# EAGLE board LRT_arduino_v2a (EAGLE 7.6.0)
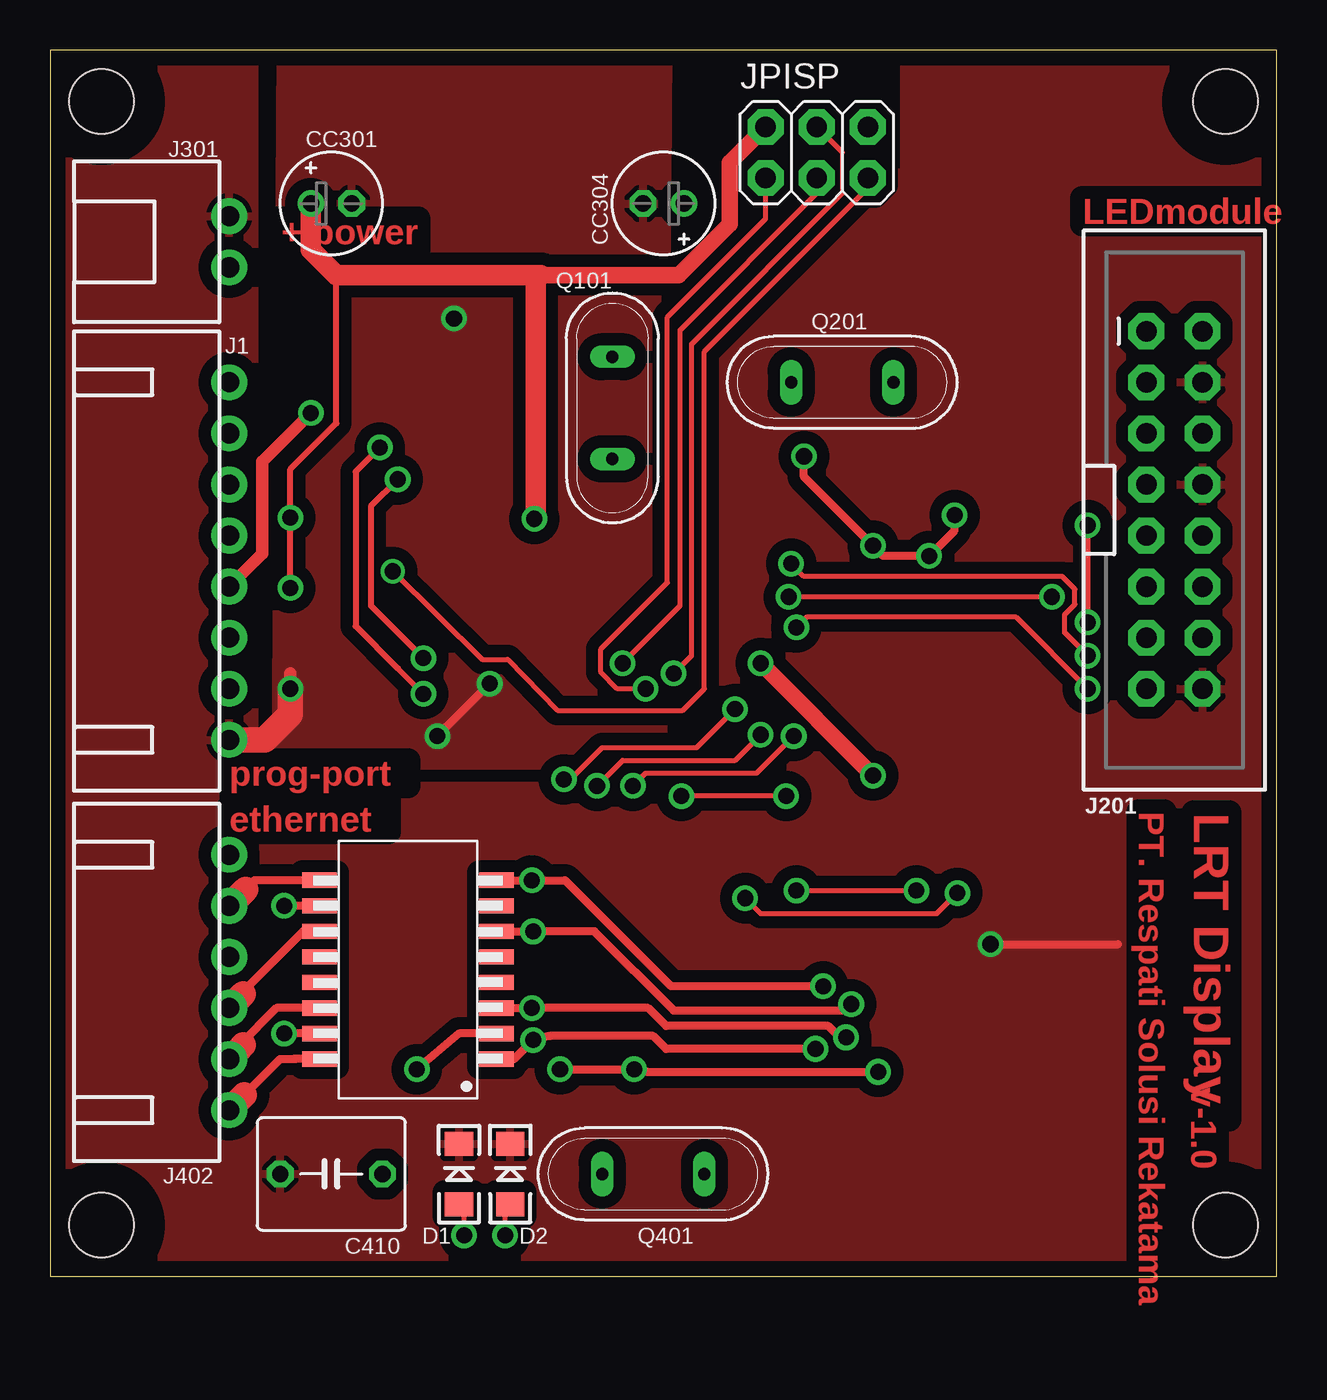
[diagram p0: board, top side]
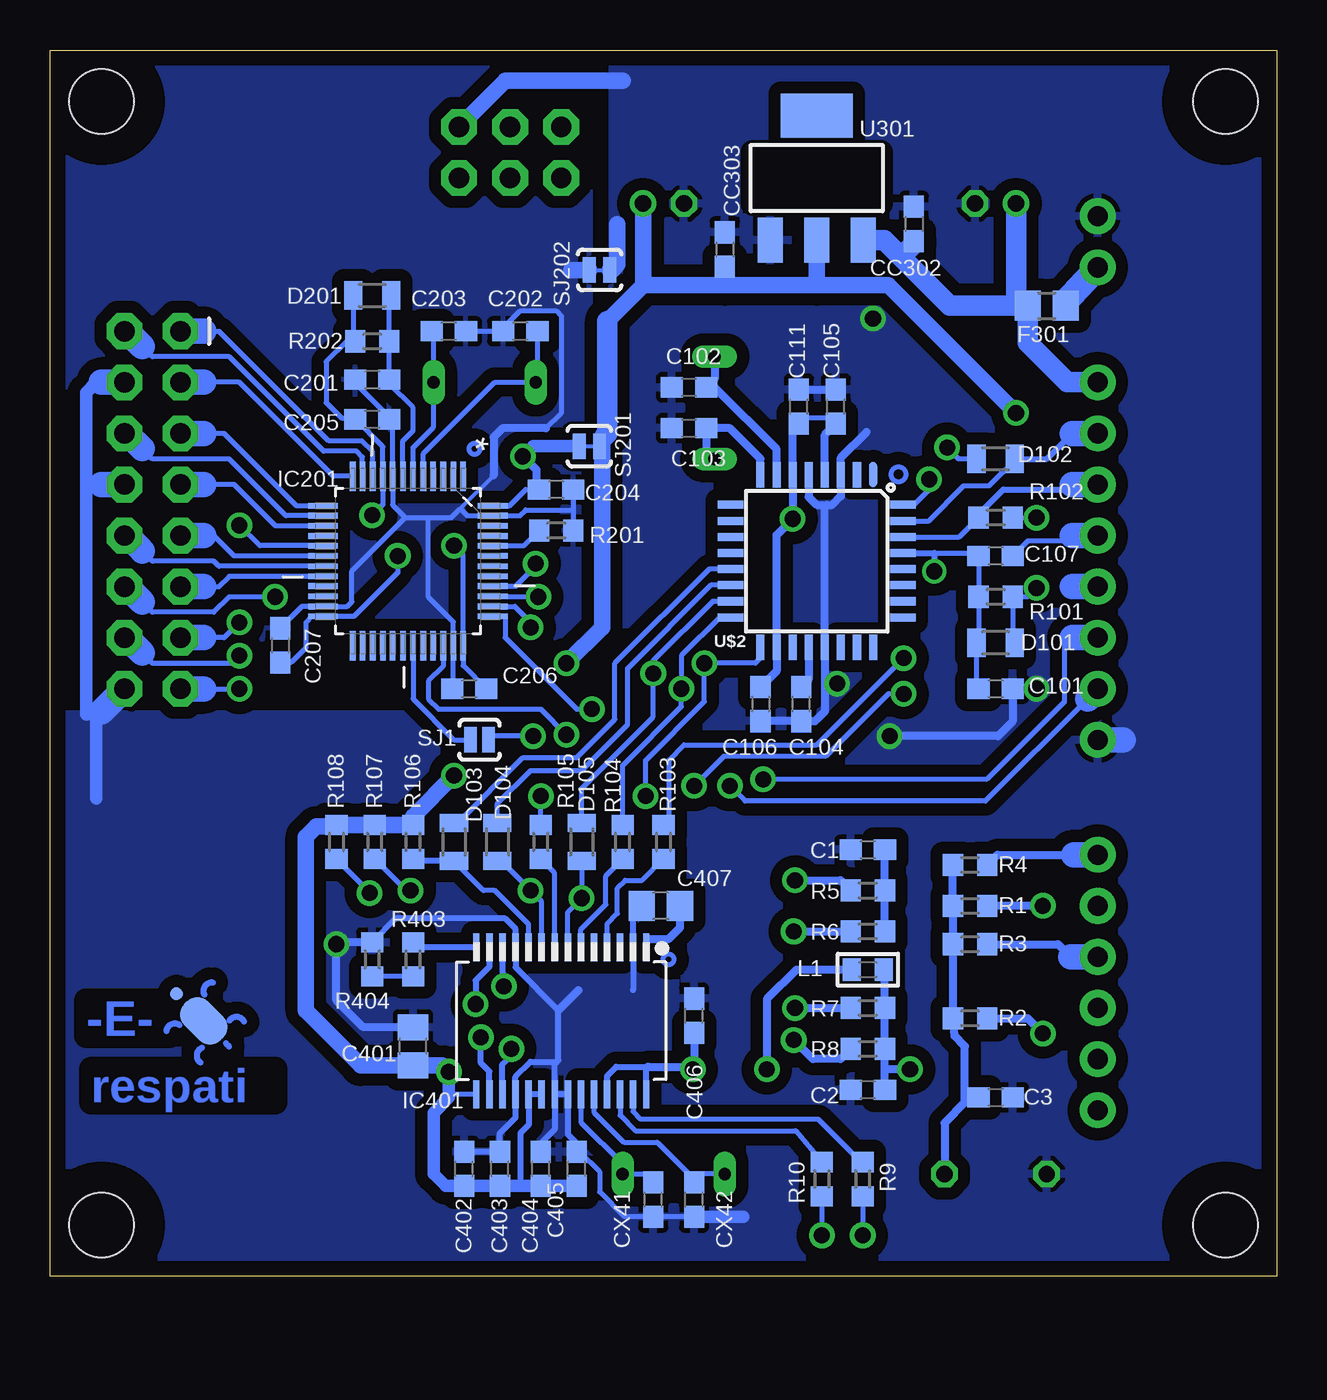
[diagram p1: board, bottom side, seen from below]

Size 60.96 x 60.96 mm. Coordinates in mm from the lower left corner, seen from the top.
Outline: 0,0 60.96,0 60.96,60.96 0,60.96 0,0
Copper layers (1*16): Top 0.035mm / dielectric 1.5mm / Bottom 0.035mm
Design rules "default *": minimum track width 10mil, minimum drill 24mil, track to track 8mil, track to pad 8mil, pad to pad 8mil, via to via 8mil, smd to smd 8mil, copper to edge 30mil, drill to drill 8mil, minimum pad ring 10mil, minimum via ring 8mil, stop-mask expansion 4mil, vias tented up to drill 0mil, thermal gap 10mil
Net classes: 0 default: width 0.406 mm, drill 0.59 mm, clearance 0.305 mm; 1 ic: width 0.254 mm, drill 0.59 mm, clearance 0.203 mm
Holes 3.2 mm at 2.54,2.54 58.42,2.54 2.54,58.42 58.42,58.42
tRestrict: area 0,55.9 to 5.1,61; area 55.9,55.9 to 61,61; area 55.9,0 to 61,5.1; area 0,0 to 5.1,5.1
bRestrict: area 0,0 to 5.1,5.1; area 55.9,0 to 61,5.1; area 55.9,55.9 to 61,61; area 0,55.9 to 5.1,61; area 19.7,53.3 to 26,55.9

## Footprints (pad centres in the part's own frame; a part is rotated, then mirrored left to right if it is on the bottom)
C0603 = smd 1.1 x 1: 1 -0.85,0; 2 0.85,0
C0805 = smd 1.3 x 1.5: 1 -0.95,0; 2 0.95,0
C050-055X075 = drill 0.813 octagon: 1 -2.54,0; 2 2.54,0
E2-5 = drill 0.813 pad 1.27: + -1.016,0 | drill 0.813 pad 1.27 octagon: - 1.016,0
LED-1206 = smd 1.2 x 1.4: A -1.5,0; C 1.5,0
MICROMELF-W = smd 0.9 x 1.4: A 0.95,0; C -0.95,0
L0805 = smd 1.3 x 1.5: 1 -0.95,0; 2 0.95,0
QFP50P900X900X160-48N = smd 1.473 x 0.279: 1 -4.216,2.743; 2 -4.216,2.261; 3 -4.216,1.753; 4 -4.216,1.245; 5 -4.216,0.762; 6 -4.216,0.254; 7 -4.216,-0.254; 8 -4.216,-0.762; 9 -4.216,-1.245; 10 -4.216,-1.753; 11 -4.216,-2.261; 12 -4.216,-2.743; 25 4.216,-2.743; 26 4.216,-2.261; 27 4.216,-1.753; 28 4.216,-1.245; 29 4.216,-0.762; 30 4.216,-0.254; 31 4.216,0.254; 32 4.216,0.762; 33 4.216,1.245; 34 4.216,1.753; 35 4.216,2.261; 36 4.216,2.743 | smd 0.279 x 1.473: 13 -2.743,-4.216; 14 -2.261,-4.216; 15 -1.753,-4.216; 16 -1.245,-4.216; 17 -0.762,-4.216; 18 -0.254,-4.216; 19 0.254,-4.216; 20 0.762,-4.216; 21 1.245,-4.216; 22 1.753,-4.216; 23 2.261,-4.216; 24 2.743,-4.216; 37 2.743,4.216; 38 2.261,4.216; 39 1.753,4.216; 40 1.245,4.216; 41 0.762,4.216; 42 0.254,4.216; 43 -0.254,4.216; 44 -0.762,4.216; 45 -1.245,4.216; 46 -1.753,4.216; 47 -2.261,4.216; 48 -2.743,4.216
SS28 = smd 0.318 x 1.397: 1 -4.225,-3.656; 2 -3.575,-3.656; 3 -2.925,-3.656; 4 -2.275,-3.656; 5 -1.625,-3.656; 6 -0.975,-3.656; 7 -0.325,-3.656; 8 0.325,-3.656; 9 0.975,-3.656; 10 1.625,-3.656; 11 2.275,-3.656; 12 2.925,-3.656; 13 3.575,-3.656; 14 4.225,-3.656; 15 4.225,3.656; 16 3.575,3.656; 17 2.925,3.656; 18 2.275,3.656; 19 1.625,3.656; 20 0.975,3.656; 21 0.325,3.656; 22 -0.325,3.656; 23 -0.975,3.656; 24 -1.625,3.656; 25 -2.275,3.656; 26 -2.925,3.656; 27 -3.575,3.656; 28 -4.225,3.656
XH-8-RA = drill 1 pad 1.778: 1 -8.89,0; 2 -6.35,0; 3 -3.81,0; 4 -1.27,0; 5 1.27,0; 6 3.81,0; 7 6.35,0; 8 8.89,0
2X08-LOCK = drill 1.016 pad 1.778 octagon: 1 -1.397,8.89; 2 1.397,8.89; 3 -1.397,6.35; 4 1.397,6.35; 5 -1.397,3.81; 6 1.397,3.81; 7 -1.397,1.27; 8 1.397,1.27; 9 -1.397,-1.27; 10 1.397,-1.27; 11 -1.397,-3.81; 12 1.397,-3.81; 13 -1.397,-6.35; 14 1.397,-6.35; 15 -1.397,-8.89; 16 1.397,-8.89
XH-2-RA = drill 1 pad 1.778: 1 -1.27,0; 2 1.27,0
XH-6-RA = drill 1 pad 1.778: 1 -6.35,0; 2 -3.81,0; 3 -1.27,0; 4 1.27,0; 5 3.81,0; 6 6.35,0
2X03 = drill 1.016 pad 1.778 octagon: 1 -2.54,-1.27; 2 -2.54,1.27; 3 0,-1.27; 4 0,1.27; 5 2.54,-1.27; 6 2.54,1.27
L0603 = smd 0.9 x 1.1: 1 -0.794,0; 2 0.794,0
QS = drill 0.61 long: 1 -2.54,0; 2 2.54,0
R0603 = smd 1 x 1.1: 1 -0.85,0; 2 0.85,0
SJ_2S-NO = smd 0.635 x 1.27: 1 -0.45,0; 2 0.45,0
SJ_2S-TRACE = smd 0.635 x 1.27: 1 -0.508,0; 2 0.508,0
SOT223 = smd 1.219 x 2.235: 1 -2.311,-3.099; 2 0,-3.099; 3 2.311,-3.099 | smd 3.6 x 2.2: 4 0,3.099
PT61017 = smd 1.7 x 0.76: 1 -4.4,4.445; 2 -4.4,3.175; 3 -4.4,1.905; 4 -4.4,0.635; 5 -4.4,-0.635; 6 -4.4,-1.905; 7 -4.4,-3.175; 8 -4.4,-4.445; 9 4.4,-4.445; 10 4.4,-3.175; 11 4.4,-1.905; 12 4.4,-0.635; 13 4.4,0.635; 14 4.4,1.905; 15 4.4,3.175; 16 4.4,4.445
KURRO-LOGO = smd 2.54 x 1.651 rotated 45 bottom: P$1 0,0 | smd 0.635 x 0.635 rotated 45 bottom: P$2 1.347,1.347
TQFP32 = smd 1.27 x 0.4: 1 -4.293,2.8; 2 -4.293,2; 3 -4.293,1.2; 4 -4.293,0.4; 5 -4.293,-0.4; 6 -4.293,-1.2; 7 -4.293,-2; 8 -4.293,-2.8; 17 4.293,-2.8; 18 4.293,-2; 19 4.293,-1.2; 20 4.293,-0.4; 21 4.293,0.4; 22 4.293,1.2; 23 4.293,2; 24 4.293,2.8 | smd 0.4 x 1.27: 9 -2.8,-4.293; 10 -2,-4.293; 11 -1.2,-4.293; 12 -0.4,-4.293; 13 0.4,-4.293; 14 1.2,-4.293; 15 2,-4.293; 16 2.8,-4.293; 25 2.8,4.293; 26 2,4.293; 27 1.2,4.293; 28 0.4,4.293; 29 -0.4,4.293; 30 -1.2,4.293; 31 -2,4.293; 32 -2.8,4.293

## Placement (x,y rotation side)
C1  100n  [C0603]  20.32,21.21 180 bottom
C2  100n  [C0603]  20.32,9.27 180 bottom
C3  1nf  [C0603]  13.97,8.89 0 bottom
C101  22p  [C0603]  13.97,29.21 0 bottom
C102  22p  [C0603]  29.21,44.2 0 bottom
C103  22p  [C0603]  29.21,42.16 0 bottom
C104  100n  [C0603]  23.62,28.45 90 bottom
C105  100n  [C0603]  23.75,43.24 90 bottom
C106  100n  [C0603]  25.65,28.45 270 bottom
C107  100n  [C0603]  13.97,35.81 180 bottom
C111  100n  [C0603]  21.91,43.24 90 bottom
C201  100n  [C0603]  44.96,44.58 180 bottom
C202  22p  [C0603]  37.59,46.99 180 bottom
C203  22p  [C0603]  41.15,46.99 180 bottom
C204  100n  [C0603]  35.81,39.12 180 bottom
C205  100n  [C0603]  44.96,42.61 180 bottom
C206  100n  [C0603]  40.13,29.21 0 bottom
C207  100n  [C0603]  49.53,31.37 270 bottom
C401  10uF/6.3V  [C0805]  42.93,11.43 90 bottom
C402  100n  [C0603]  34.8,5.33 90 bottom
C403  100n  [C0603]  36.58,5.33 90 bottom
C404  100n  [C0603]  38.61,5.33 90 bottom
C405  100n  [C0603]  28.96,12.95 90 bottom
C406  100n  [C0603]  40.39,5.33 90 bottom
C407  10uF/6.3V  [C0805]  30.61,18.41 180 bottom
C410  1nF/2KV  [C050-055X075]  13.97,5.08 180 top
CC301  470uF/50V  [E2-5]  13.97,53.34 0 top
CC302  100n  [C0603]  18.03,52.32 270 bottom
CC303  100n  [C0603]  27.43,51.05 270 bottom
CC304  47uF/16V  [E2-5]  30.48,53.34 180 top
CX41  15p  [C0603]  30.99,3.81 90 bottom
CX42  15p  [C0603]  28.96,3.81 90 bottom
D1  BLUE  [LED-1206]  20.32,5.08 90 top
D2  BLUE  [LED-1206]  22.86,5.08 90 top
D101  SCHOTTKY  [MICROMELF-W]  13.97,31.5 180 bottom
D102  [MICROMELF-W]  13.97,40.64 180 bottom
D103  [MICROMELF-W]  40.89,21.59 270 bottom
D104  [MICROMELF-W]  38.73,21.59 270 bottom
D105  [MICROMELF-W]  34.54,21.59 270 bottom
D201  SCHOTTKY  [MICROMELF-W]  44.96,48.77 0 bottom
F301  500mA  [L0805]  11.43,48.26 0 bottom
IC201  STM32F103C8T6  [QFP50P900X900X160-48N]  43.18,35.56 270 bottom
IC401  ENC28J60-SS  [SS28]  35.56,12.7 180 bottom
J1  PROG  [XH-8-RA]  8.89,35.56 90 top
J201  RGB_OUT  [2X08-LOCK]  55.88,38.1 0 top
J301  POWER  [XH-2-RA]  8.89,51.44 90 top
J402  CONN_OUT  [XH-6-RA]  8.89,14.61 90 top
JPISP  PIN-2X3-ISP  [2X03]  38.1,55.88 0 top
L1  FB_0603  [L0603]  20.32,15.24 180 bottom
Q101  16MHz  [QS]  27.94,43.18 90 top
Q201  8MHz  [QS]  39.37,44.45 180 top
Q401  25MHz  [QS]  29.97,5.08 180 top
R1  75R  [R0603]  15.24,18.41 0 bottom
R2  75R  [R0603]  15.24,12.83 0 bottom
R3  75R  [R0603]  15.24,16.51 0 bottom
R4  75R  [R0603]  15.24,20.45 0 bottom
R5  49R9  [R0603]  20.32,19.18 180 bottom
R6  49R9  [R0603]  20.32,17.14 180 bottom
R7  49R9  [R0603]  20.32,13.34 180 bottom
R8  49R9  [R0603]  20.32,11.3 180 bottom
R9  1k  [R0603]  20.57,4.83 90 bottom
R10  1k  [R0603]  22.61,4.83 90 bottom
R101  10k  [R0603]  13.97,33.78 0 bottom
R102  10k  [R0603]  13.97,37.72 0 bottom
R103  100R  [R0603]  30.48,21.59 90 bottom
R104  100R  [R0603]  32.51,21.59 90 bottom
R105  100R  [R0603]  36.58,21.59 90 bottom
R106  10k  [R0603]  42.93,21.59 90 bottom
R107  10k  [R0603]  44.83,21.59 90 bottom
R108  10k  [R0603]  46.74,21.59 90 bottom
R201  100K  [R0603]  35.81,37.08 0 bottom
R202  100K  [R0603]  44.96,46.48 0 bottom
R403  2k2  [R0603]  42.93,15.75 270 bottom
R404  120R  [R0603]  44.96,15.75 270 bottom
SJ1  SOLDERJUMPER-OLDNO  [SJ_2S-NO]  39.62,26.67 180 bottom
SJ201  [SJ_2S-TRACE]  34.16,41.27 0 bottom
SJ202  [SJ_2S-TRACE]  33.66,50.04 0 bottom
U301  LM1117-3V3  [SOT223]  22.86,54.61 0 bottom
U401  PT61017PEL  [PT61017]  17.78,15.24 180 top
U$1  KURRO_FOOTPRINT  [KURRO-LOGO]  53.34,12.7 0 top
U$2  ATMEGA328-SMDTQFP32  [TQFP32]  22.86,35.56 270 bottom

## Library data of the parts
C1-C3 C102 C103 C401-C407 CC301 CC304 CX41 CX42 F301 R1-R10 R101-R108 R403 R404 = rcl
C101 C104-C107 C111 C201-C207 C410 CC302 CC303 R201 R202 = resistor
D1 D2 = SparkFun-LED; PROD_ID: DIO-09911
D101-D105 D201 = diode
IC201 = ST Microelctronics_By_element14_Batch_1; LINK: https://www.tokopedia.com/embedded-world/stm32-stm32f103c8t6-lqfp48-arm-based-microcontroller-mcu-lqfp-48-au02; MPN: STM32F103CBT6; OC_FARNELL: 1606327; OC_NEWARK: 11N8296; PACKAGE: QFP-48; SUPPLIER: STMICROELECTRONICS
IC401 = edes_library
J1 J301 J402 = SparkFun-Connectors
J201 JPISP U$2 = edes_lib_160827
L1 = rc-master
Q101 Q201 Q401 = special
SJ1 = SparkFun-Retired
SJ201 SJ202 = SparkFun-Passives
U301 = SparkFun-PowerIC; PROD_ID: VREG-08170
U401 = Bourns_By_element14_Batch_1
U$1 = SparkFun

## Nets
!ENC_INT: IC401.4 R103.1
!ENC_RESET: D103.A IC401.10 R106.1
!ENC_SS: D104.A IC401.9 R107.1
!OE [ic]: IC201.38 J201.15
+3V3: C401.1 C402.1 C403.1 C404.1 C405.1 C406.1 CC303.2 CC304.+ IC401.15 IC401.19 IC401.20 IC401.25 IC401.28 J1.4 L1.2 R106.2 R107.2 R108.2 SJ201.2 U301.2
+5V: C105.1 C106.1 C111.1 CC301.+ CC302.2 D101.C F301.1 J1.8 JPISP.2 R101.2 R102.2 U301.3 U$2.4 U$2.6 U$2.18
AGND: C201.2 C202.2 C203.1 C204.1 C205.1 C206.1 C207.1 IC201.8 IC201.23 IC201.35 IC201.47 R201.2 SJ202.1
B1 [ic]: IC201.12 J201.3
B2 [ic]: IC201.15 J201.7
BOOT0 [ic]: IC201.44 R201.1
CLK [ic]: IC201.17 J201.13
DA [ic]: IC201.18 J201.9
DB [ic]: IC201.19 J201.10
DC [ic]: IC201.20 J201.11
DD [ic]: IC201.39 J201.12
DISPLAY_RXD [ic]: IC201.31 SJ1.2
DISPLAY_TXD [ic]: IC201.30
ENC_MISO: IC401.6 R104.1
ENC_MOSI: D105.A IC401.7 R108.1
ENC_SCK: IC401.8 R105.1
G1 [ic]: IC201.11 J201.2
G2 [ic]: IC201.14 J201.6
GND: C1.2 C2.2 C3.2 C101.2 C102.1 C103.1 C104.1 C105.2 C106.2 C111.2 C401.2 C402.2 C403.2 C404.2 C405.2 C406.2 C407.2 C410.2 CC301.- CC302.1 CC303.1 CC304.- CX41.1 CX42.1 D1.C D2.C IC401.2 IC401.11 IC401.18 IC401.21 IC401.22 J1.1 J201.4 J201.8 J201.16 J301.2 JPISP.6 R404.1 SJ202.2 U301.1 U$2.3 U$2.5 U$2.21
LEDA: IC401.27 R9.2
LEDB: IC401.26 R10.2
MEGA-RST [ic]: C101.1 C107.2 D101.A JPISP.5 R101.1 U$2.29
MISO: JPISP.1 R104.2 U$2.16
MOSI: D105.C JPISP.4 U$2.15
N$1 [ic]: IC201.29
N$2 [ic]: IC201.45
N$3: D1.A R9.1
N$4: D2.A R10.1
N$5: C3.1 C410.1 R1.1 R2.1 R3.1 R4.1
N$6 [ic]: C203.2 IC201.6 Q201.1
N$7 [ic]: C202.1 IC201.5 Q201.2
N$8 [ic]: IC201.46
N$9: J402.4 R3.2
N$10: R403.2 R404.2
N$11 [ic]: IC201.3
N$12: C407.1 IC401.1
N$13 [ic]: IC201.42
N$14 [ic]: IC201.43
N$15 [ic]: IC201.21
N$16 [ic]: IC201.22
N$17: J402.6 R4.2
N$18: CX42.2 IC401.24 Q401.2
N$19: CX41.2 IC401.23 Q401.1
N$20: C1.1 R5.1 R6.1
N$23: IC401.14 R403.1
N$24 [ic]: IC201.32
N$25: C104.2 U$2.20
N$26: C103.2 Q101.1 U$2.8
N$27 [ic]: IC201.25
N$28 [ic]: IC201.26
N$29 [ic]: IC201.27
N$30 [ic]: IC201.28
N$31: C102.2 Q101.2 U$2.7
N$35: R103.2 U$2.32
N$36 [ic]: IC201.2
N$37 [ic]: C107.1 J1.5
N$39: D103.C U$2.13
N$40: D102.A SJ1.1
N$42 [ic]: IC201.16
N$46 [ic]: IC201.33
N$51 [ic]: IC201.41
N$57 [ic]: IC201.4
N$58 [ic]: IC201.1
PROG_RXD: D102.C J1.7 U$2.31
PROG_TXD: J1.6 R102.1 U$2.30
R1 [ic]: IC201.10 J201.1
R2 [ic]: IC201.13 J201.5
RD+: IC401.13 R6.2 U401.6
RD-: IC401.12 R5.2 U401.8
RD_CT: U401.7
RST [ic]: C201.1 D201.A IC201.7 R202.2
RX+: J402.3 U401.11
RX-: J402.5 U401.9
RX_CT: R1.2 U401.10
SCK: JPISP.3 R105.2 U$2.17
SS: D104.C U$2.14
STB [ic]: IC201.40 J201.14
SWCLK2 [ic]: IC201.37 J1.3
SWDIO2 [ic]: IC201.34 J1.2
TD+: IC401.17 R8.2 U401.1
TD-: IC401.16 R7.2 U401.3
TD_CT: C2.1 L1.1 R7.1 R8.1 U401.2
TX+: J402.1 U401.16
TX-: J402.2 U401.14
TX_CT: R2.2 U401.15
V+: F301.2 J301.1
VDD [ic]: C204.2 C205.2 C206.2 C207.2 D201.C IC201.9 IC201.24 IC201.36 IC201.48 R202.1 SJ201.1

## Tracks (layer width: path | path; a pad name or v marks a point on that pad's centre or on a via)
!ENC_INT
  Bottom 0.254: R103.1 31.54,19.68 32.38,19.68 32.77,19.3 32.77,18.03 33.28,17.52 IC401.4
!ENC_RESET
  Bottom 0.254: D103.A 39.43,19.18 38.86,19.18 37.19,17.5 IC401.10
  Bottom 0.305: D103.A 42.83,20.64 R106.1
!ENC_SS  (via drill 0.8 pad 1.27)
  Top 0.254: v37.08,19.18 v43.05,19.18
  Bottom 0.254: IC401.9 36.53,18.63 v37.08,19.18 38.55,20.64 D104.A | v43.05,19.18 43.27,19.18 R107.1
!OE  (via drill 0.8 pad 1.27)
  Top 0.254: v51.56,29.21 48.01,32.77 37.59,32.77 v37.08,32.26
  Bottom 0.254: 53.34,29.21 v51.56,29.21 | IC201.38 37.87,33.3 37.08,32.51 v37.08,32.26
  Bottom 1.27: J201.15 53.34,29.21
+3V3  (via drill 0.8 pad 1.27)
  Top 0.406: v41.15,10.16 29.65,10.16 v29.02,10.29 v25.34,10.29
  Top 0.61: v12.95,42.93 10.54,40.51 10.54,35.94 J1.4
  Top 0.813: v40.89,24.89 v35.31,30.48
  Bottom 0.254: IC401.15 40.99,9.04 41.15,8.89
  Bottom 0.305: IC401.20 IC401.19 37.19,7.52 37.59,7.11 37.59,4.48 | IC401.25 33.28,9.96 32.83,10.41 31.24,10.41 31.34,10.32 IC401.28
  Bottom 0.406: SJ201.2 33.53,41.4 33.4,41.53 33.4,41.78 | L1.2 23.88,15.24 25.34,13.78 v25.34,10.29 | C405.1 28.96,10.35 v29.02,10.29 29.4,10.41 31.24,10.41
  Bottom 0.61: 46.82,22.35 R108.2 | R106.2 42.93,22.86 | C402.1 C403.1 37.59,4.48 C404.1 C406.1 41.31,4.48 41.91,5.08 41.91,8.13 41.15,8.89 v41.15,10.16
  Bottom 0.813: 46.82,22.35 47.75,22.35 48.26,21.84 48.26,13.21 45.53,10.48 C401.1 41.47,10.48 v41.15,10.16 | R108.2 R107.2 R106.2 | 42.93,22.86 v40.89,24.89 | v35.31,30.48 33.53,32.26 33.53,41.4 33.53,41.66 | 22.86,49.28 19.3,49.28 v12.95,42.93 | 22.86,49.28 27.43,49.28 | 27.43,49.28 31.5,49.28 | U301.2 22.86,49.28 | CC303.2 27.43,49.28 | CC304.+ 31.5,49.28 | 31.5,49.28 33.27,47.5
  Bottom 1.016: 33.4,41.78 33.27,41.91 33.27,47.5
  Bottom 1.27: J1.4 10.16,34.29
+5V  (via drill 0.8 pad 1.27)
  Top 0.305: v11.94,34.23 v11.94,37.72 11.94,40.13 14.22,42.42 14.22,49.78
  Top 0.813: JPISP.2 33.78,55.37 33.78,52.32 31.24,49.78 24.38,49.78
  Top 1.016: v24.06,37.66 24.13,37.73 24.13,49.53 24.38,49.78 14.22,49.78 12.95,51.05 CC301.+
  Bottom 0.254: R102.2 v11.94,37.72 | v11.94,34.23 12.38,33.78 R101.2 13.12,31.6 D101.C | C111.1 22.07,42.39 22.35,42.67 23.47,42.67 C105.1
  Bottom 0.406: C106.1 24.86,30.09 U$2.18 24.86,36.86 v24.06,37.66 U$2.6 24.06,42.08 C105.1 | U$2.4 22.46,41.84 C111.1
  Bottom 1.016: 18.67,50.67 16.26,48.26 F301.1 | CC302.2 18.03,51.31 18.67,50.67 | U301.3 19.51,51.51 18.67,50.67 | J1.8 10.41,44.45 12.38,46.42 F301.1 | F301.1 12.95,48.83 CC301.+
AGND
  Bottom 0.203: 38.92,39.81 40.58,38.16
  Bottom 0.254: 43.94,42.38 C205.1 | C205.1 44.11,42.71 45.81,44.41 C201.2 | C206.1 40.92,29.27 IC201.35 40.92,32.54 42.16,33.78 42.16,37.72 | C202.2 C203.1 38.61,46.99 37.59,48.01 35.81,48.01 35.56,47.75 35.56,42.93 36.32,42.16 37.08,42.16 | 43.31,37.72 45.97,35.05 45.97,33.53 46.2,33.3 IC201.23 48.45,33.3 C207.1 | 43.31,37.72 42.16,37.72 | 42.16,37.72 41.02,37.72 40.58,38.16 40.23,37.82 IC201.47 37.62,37.82 37.34,38.1 34.96,38.1 | C204.1 34.96,38.1 | 34.96,38.1 R201.2 | 43.31,37.72 43.94,38.35 IC201.8 43.94,42.44 C205.1
  Bottom 0.305: C207.1 49.7,32.22
  Bottom 0.406: 36.32,42.16 38.48,42.16 38.92,41.72 38.92,39.81
  Bottom 0.813: SJ202.1 35.05,50.04
  pour Bottom (isolate 0.61): 34.04,60.96 60.96,60.96 60.96,28.96 34.04,28.96
B1
  Bottom 0.254: IC201.12 46.89,39.78 51.56,44.45 53.34,44.45
  Bottom 1.27: J201.3 53.34,44.45
B2
  Bottom 0.254: IC201.15 49.76,37.31 51.82,39.37 53.34,39.37
  Bottom 1.27: J201.7 53.34,39.37
BOOT0
  Bottom 0.254: IC201.44 37.43,36.32 R201.1
CLK  (via drill 0.8 pad 1.27)
  Top 0.254: v51.56,37.34 v51.56,32.51
  Bottom 0.254: IC201.17 50.55,36.32 v51.56,37.34 | v51.56,32.51 52.32,31.75 53.34,31.75
  Bottom 1.27: J201.13 53.34,31.75
DA
  Bottom 0.254: IC201.18 51.82,35.81 52.83,36.83 53.34,36.83
  Bottom 1.27: J201.9 53.34,36.83
DB
  Bottom 0.254: IC201.19 52.58,35.31 52.83,35.56 55.88,35.56 56.52,36.2
  Bottom 1.27: J201.10 57.15,36.83 56.52,36.2 56.39,36.07
DC
  Bottom 0.254: 53.34,34.29 52.58,34.29 52.07,34.8 IC201.20
  Bottom 1.27: J201.11 53.34,34.29
DD  (via drill 0.8 pad 1.27)
  Top 0.254: v49.78,33.78 v36.7,33.78
  Bottom 0.254: 56.39,33.53 55.88,33.02 52.83,33.02 52.07,33.78 v49.78,33.78 | IC201.39 36.73,33.81 v36.7,33.78
  Bottom 1.27: J201.12 57.15,34.29 56.39,33.53
DISPLAY_RXD
  Bottom 0.254: IC201.31 42.93,28.7 40.89,26.67 SJ1.2
ENC_MISO
  Bottom 0.254: IC401.6 34.59,17.23 33.34,18.48 33.34,19.91 R104.1
ENC_MOSI  (via drill 0.8 pad 1.27)
  Top 0.254: v34.54,18.8 35.31,18.03 44.07,18.03 v45.09,19.05
  Bottom 0.254: IC401.7 35.23,18.11 v34.54,18.8 D105.A | v45.09,19.05 45.05,19.05 R108.1
ENC_SCK
  Bottom 0.254: IC401.8 35.88,20.05 R105.1
G1
  Bottom 0.254: IC201.11 45.44,40.74 45.72,41.02 47.37,41.02 52.07,45.72 55.88,45.72 56.39,46.23
  Bottom 1.27: J201.2 57.15,46.99 56.39,46.23
G2
  Bottom 0.254: IC201.14 49.25,37.82 52.07,40.64 55.88,40.64 56.39,41.15
  Bottom 1.27: J201.6 57.15,41.91 56.39,41.15
GND  (via drill 0.8 pad 1.27)
  Top 0.406: v46.74,16.51 53.09,16.51 | v21.84,29.46 v19.24,26.86
  Top 0.61: v11.94,29.21 11.94,29.97
  Top 1.27: J1.1 10.67,26.67 11.94,27.94 v11.94,29.21
  Bottom 0.254: C402.2 34.63,6.18 33.66,5.21 33.66,4.19 32.42,2.96 CX41.1 CX42.1 | C101.2 v11.94,29.21
  Bottom 0.305: IC401.21 35.88,7.29 36.58,6.6 C403.2 | C402.2 34.8,6.6 35.23,7.04 IC401.22 IC401.21 | IC401.21 35.88,10.55 35.77,10.67 | IC401.18 | C406.2 C404.2 38.61,7.11 37.85,7.87 IC401.18 | C407.2 31.98,18.08 IC401.2 31.98,14.24 32,14.22 | IC401.18 37.85,9.91 37.08,10.67 35.77,10.67 | 35.77,10.67 35.7,10.73 35.7,13.22 37.84,15.36 IC401.11 37.84,17.26 38.35,17.78 43.78,17.78 R404.1 | 22.95,27.6 22.86,27.69
  Bottom 0.406: U$2.5 23.26,38.75 22.86,38.35 22.35,38.35 | 22.35,38.35 22.1,38.35 21.66,38.79 U$2.3 21.66,40.7 20.38,41.97 | 22.95,27.6 C104.1 C106.2 | 22.35,38.35 22.46,38.25 U$2.21 22.46,28.09 22.86,27.69 | C101.2 13.12,27.58 13.84,26.86 v19.24,26.86 | 34.7,14.22 35.7,13.22 | C401.2 45.4,12.38 46.74,13.72 v46.74,16.51 46.65,16.6 R404.1 | C105.2 C111.2
  Bottom 0.61: 58.42,44.45 58.67,44.45 59.18,43.94 59.18,39.37 | 59.18,39.37 59.18,27.94 58.42,28.07 58.67,27.81 58.67,23.75 | 58.42,39.37 59.18,39.37 | CX42.1 26.5,2.96
  Bottom 0.813: SJ202.2 33.02,50.04 32.77,50.29 32.77,52.32 | JPISP.6 38.35,59.44 32.51,59.44
  Bottom 1.27: J201.4 58.42,44.45 | J201.8 58.42,39.37 | J201.16 58.42,28.07 | J1.1 7.62,26.67
  other vias: 20.07,47.62
  pour Bottom (isolate 0.61): 0,60.96 33.02,60.96 33.02,27.94 60.96,27.94 60.96,0 0,0
  pour Top (isolate 0.61): 11.18,25.4 30.48,25.4 30.73,60.96 11.43,60.96
  pour Top (isolate 0.61, rank 6): 10.16,24.38 10.16,60.96 0,60.96 0,0 60.96,0 60.96,60.96 42.42,60.96 42.42,54.86 31.75,54.86 31.75,24.38
LEDA
  Bottom 0.254: 31.98,9.25 IC401.27 31.98,8.17 31.62,7.81 22.8,7.81 20.66,5.68 R9.2
LEDB
  Bottom 0.254: 32.63,9.14 IC401.26 32.63,8 31.88,7.24 23.91,7.24 R10.2
MEGA-RST  (via drill 0.8 pad 1.02)
  Top 0.254: v17.02,35.05 21.46,30.67 22.73,30.67 25.21,28.13 31.43,28.13 32.51,29.21 32.51,45.97 40.64,54.1 JPISP.5
  Bottom 0.254: U$2.29 14.97,35.96 C107.2 R101.1 14.82,31.6 D101.A 14.92,29.31 C101.1
  Bottom 0.305: U$2.29 17.02,35.96 v17.02,35.05
MISO  (via drill 0.8 pad 1.27)
  Top 0.254: v29.59,29.21 28.19,29.21 27.37,30.04 27.37,31.18 30.67,34.48 30.67,47.69 35.56,52.58 JPISP.1
  Bottom 0.254: R104.2 32.51,25.4 29.59,28.32 v29.59,29.21 29.59,30.86 27.69,32.76 U$2.16
MOSI  (via drill 0.8 pad 1.27)
  Top 0.203: 39.37,53.85 39.37,55.88
  Top 0.254: v30.99,29.97 31.88,30.86 31.88,46.35 39.37,53.85 | 39.37,55.88 JPISP.4
  Bottom 0.254: D105.C 34.54,24.26 30.99,27.81 v30.99,29.97 30.99,30.61 28.04,33.56 U$2.15
N$3  (via drill 0.8 pad 1.27)
  Top 0.254: v20.57,2.03 20.57,3.33 D1.A
  Bottom 0.254: R9.1 v20.57,2.03
N$4  (via drill 0.8 pad 1.27)
  Top 0.254: v22.61,2.03 22.61,3.07 D2.A
  Bottom 0.254: R10.1 v22.61,2.03
N$5
  Bottom 0.254: C3.1 15.49,8.89
  Bottom 0.406: R4.1 R1.1 R3.1 R2.1 16,11.98 16,11.94 15.49,11.43 15.49,8.89 15.49,8.64 16.51,7.62 C410.1
N$6
  Bottom 0.254: IC201.6 42.93,41.21 41.91,42.23 Q201.1 41.91,46.9 C203.2
N$7
  Bottom 0.254: IC201.5 42.42,40.89 38.86,44.45 Q201.2 36.74,44.54 C202.1
N$9
  Bottom 0.406: R3.2 10.86,16.51 10.22,15.88
  Bottom 1.27: J402.4 10.22,15.88
N$10
  Bottom 0.254: R403.2 R404.2
N$12
  Bottom 0.305: IC401.1 31.34,16.61 31.18,16.76
  Bottom 0.406: 31.18,16.76 30.23,16.76 29.66,17.33 C407.1
N$17
  Bottom 0.406: R4.2 13.88,20.95 10.1,20.95
  Bottom 1.27: J402.6 10.1,20.95
N$18
  Bottom 0.254: IC401.24 33.94,8.15 32.45,6.67 30.8,6.67 28.96,4.83 CX42.2 28.92,5.08 Q401.2
N$19
  Bottom 0.254: IC401.23 34.59,7.66 32.51,5.59 Q401.1 31.41,5.08 CX41.2
N$20
  Bottom 0.406: R6.1 R5.1 C1.1
N$23
  Bottom 0.254: 42.68,16.36 R403.1
  Bottom 0.305: IC401.14 42.68,16.36
N$25
  Bottom 0.406: U$2.20 23.26,29.66 C104.2
N$26
  Bottom 0.406: U$2.8 25.66,40.65 27.18,42.16 C103.2 28.36,41.06 Q101.1
N$31
  Bottom 0.406: U$2.7 24.86,41.12 27.94,44.2 C102.2 27.94,44.62 Q101.2
N$35  (via drill 0.8 pad 1.27)
  Top 0.305: v17.27,39.62 15.94,38.29 15.94,33.34 v18.54,30.73
  Bottom 0.254: v18.54,30.73 22.86,26.42 29.46,26.42 30.23,25.65 30.23,22.69 R103.2 | v17.27,39.62 17.27,39.12 18.03,38.35 U$2.32
N$37
  Bottom 0.254: C107.1 12.36,36.58 10.41,36.58 10.16,36.83
  Bottom 1.27: J1.5 10.16,36.83
N$39
  Bottom 0.254: D103.C 40.71,22.54 37.47,25.78 34.8,25.78 32.89,27.69 32.89,30.48 28.21,35.16 U$2.13
N$40  (via drill 0.8 pad 1.27)
  Top 0.254: 17.27,30.23 v18.54,28.96 | v28.96,24.38 29.59,25.02 35.12,25.02 v36.96,26.86 | 16,40.83 v16.38,41.21
  Top 0.305: 16,40.83 15.18,40.01 15.18,32.32 17.27,30.23
  Bottom 0.254: v18.54,28.96 19.3,28.96 22.42,25.84 27.5,25.84 v28.96,24.38 | v36.96,26.86 39.12,26.86 39.17,26.8 SJ1.1 | D102.A 15.81,40.64 v16.38,41.21
PROG_RXD
  Bottom 0.254: U$2.31 17.3,37.56 15.56,39.31 14.29,39.31 12.95,40.64
  Bottom 0.305: 12.95,40.64 12.95,40.89 | D102.C 11.43,40.64 10.16,41.91
  Bottom 0.406: 12.95,40.64 D102.C
  Bottom 1.27: J1.7 10.16,41.91
PROG_TXD
  Bottom 0.254: U$2.30 15.78,36.76 R102.1
  Bottom 0.305: R102.1 14.76,37.95 13.59,39.12 10.41,39.12 10.16,39.37
  Bottom 1.27: J1.6 10.16,39.37
R1
  Bottom 0.254: IC201.10 44.93,41 45.47,41.53 47.12,41.53 52.58,46.99 53.34,46.99
  Bottom 1.27: J201.1 53.34,46.99
R2
  Bottom 0.254: IC201.13 48.72,38.3 52.32,41.91 53.34,41.91
  Bottom 1.27: J201.5 53.34,41.91
RD+  (via drill 0.8 pad 1.27)
  Top 0.406: U401.6 v24,17.14 27.05,17.14 30.99,13.21 39.5,13.21 v39.81,13.53
  Bottom 0.305: IC401.13 39.13,15.39 39.81,14.71 v39.81,13.53
  Bottom 0.406: v24,17.14 R6.2
RD-  (via drill 0.8 pad 1.27)
  Top 0.406: U401.8 v23.94,19.68 25.59,19.68 30.86,14.41 v38.42,14.41
  Bottom 0.305: IC401.12 38.48,15.12 38.42,14.99 v38.42,14.41
  Bottom 0.406: v23.94,19.68 21.68,19.68 R5.2
RST
  Bottom 0.254: D201.A 44.11,48.67 R202.2 C201.1 44.11,44.36 42.93,43.18 42.93,42.04 43.43,41.53 IC201.7
RX+
  Top 0.406: U401.11 12.57,17.14 9.91,14.48 9.91,14.35 9.59,14.03
  Top 1.27: J402.3 9.59,14.03
RX-
  Top 0.406: U401.9 10.16,19.68 9.72,19.24
  Top 1.27: J402.5 9.72,19.24
RX_CT  (via drill 0.8 pad 1.27)
  Top 0.406: U401.10 v11.62,18.41
  Bottom 0.406: v11.62,18.41 14.22,18.41 R1.2 14.41,18.41
SCK  (via drill 0.8 pad 1.27)
  Top 0.254: v36.58,23.88 v31.37,23.88 | v28.45,30.48 31.3,33.34 31.3,47.05 38.1,53.85 JPISP.3
  Bottom 0.254: R105.2 v36.58,23.88 | v31.37,23.88 31.37,25.65 28.45,28.57 v28.45,30.48 25.91,30.48 25.66,30.73 U$2.17
SS
  Bottom 0.254: D104.C 38.73,23.5 37.08,25.15 34.54,25.15 32.26,27.43 32.26,30.23 28.12,34.36 U$2.14
STB  (via drill 0.8 pad 1.27)
  Top 0.254: v51.56,30.86 50.42,32 50.42,32.89 50.93,33.4 50.93,34.16 50.29,34.8 37.47,34.8 v36.83,35.43
  Bottom 0.254: 56.39,30.99 55.88,30.48 51.94,30.48 v51.56,30.86 | IC201.40 37.82,34.31 36.83,35.31 v36.83,35.43
  Bottom 1.27: J201.14 57.15,31.75 56.39,30.99
SWCLK2  (via drill 0.8 pad 1.27)
  Top 0.254: v25.53,24.7 25.84,24.7 27.43,26.29 32.13,26.29 v34.04,28.19
  Bottom 0.254: IC201.37 38.41,32.82 38.35,32.77 38.35,31.75 34.8,28.19 v34.04,28.19 | v25.53,24.7 14.41,24.7 10.54,28.57 10.54,31.37 10.16,31.75
  Bottom 1.27: J1.3 10.16,31.75
SWDIO2  (via drill 0.8 pad 1.27)
  Top 0.254: v27.18,24.38 28.45,25.65 34.04,25.65 v35.31,26.92
  Bottom 0.254: IC201.34 41.43,30.33 42.16,29.59 42.16,28.7 41.66,28.19 36.58,28.19 v35.31,26.92 | v27.18,24.38 26.42,23.62 14.48,23.62 9.4,28.7
  Bottom 1.27: J1.2 9.4,28.7
TD+  (via drill 0.8 pad 1.27)
  Top 0.406: v38.04,11.3 30.61,11.3 29.97,11.94 24.83,11.94 v24,11.75 23.05,10.79 U401.1
  Bottom 0.305: IC401.17 38.48,10.54 38.04,10.99 v38.04,11.3
  Bottom 0.406: R8.2 21.68,10.79 23.05,10.79 v24,11.75
TD-  (via drill 0.8 pad 1.27)
  Top 0.406: v39.56,11.87 39.43,12 39.12,12 38.67,12.45 30.61,12.45 29.72,13.34 v23.94,13.34 U401.3
  Bottom 0.305: IC401.16 39.13,10.18 39.56,10.6 v39.56,11.87
  Bottom 0.406: v23.94,13.34 R7.2
TD_CT  (via drill 0.8 pad 1.27)
  Top 0.406: U401.2 20.32,12.06 v18.22,10.29
  Bottom 0.406: 19.49,12.06 19.49,11.33 | 19.49,11.33 R8.1 | R8.1 R7.1 19.47,15.18 L1.1 | C2.1 19.47,10.16 | 19.47,10.16 R8.1 | 19.49,11.33 19.49,11.24 | v18.22,10.29 19.34,10.29 19.47,10.16
TX+
  Top 0.406: U401.16 12.19,10.79 12.06,10.79 11.43,10.79 9.65,9.02
  Top 1.27: J402.1 9.65,9.02
TX-
  Top 0.406: U401.14 11.24,13.34 9.34,11.43 9.34,11.24
  Top 1.27: J402.2 9.34,11.24 9.59,11.49
TX_CT  (via drill 0.8 pad 1.27)
  Top 0.406: U401.15 v11.62,12.06
  Bottom 0.406: R2.2 12.38,12.83 v11.62,12.06
V+
  Bottom 1.016: 10.48,48.45 F301.2
  Bottom 1.27: J301.1 10.48,48.45
VDD  (via drill 0.8 pad 1.27)
  Top 0.406: v44.96,37.85 44.96,37.08 v43.69,35.81 41.4,35.81 v40.89,36.32 37.47,39.75 v37.47,40.77
  Bottom 0.254: D201.C 45.91,46.58 R202.1 46.23,46.48 47.24,45.47 47.24,43.43 46.48,42.67 45.94,42.67 C205.2 | 45.72,42.55 45.72,42.46 C205.2 | v44.96,37.85 44.42,38.38 IC201.9 44.42,41.25 45.78,42.61 C205.2 | v43.69,35.81 43.69,34.99 45.86,32.82 IC201.24 47.95,32.82 48.26,32.51 48.26,31.24 48.98,30.52 C207.2 | v40.89,36.32 40.44,35.87 IC201.36 40.44,30.36 C206.2 | 36.79,39.24 C204.2 37.34,39.12 38.15,38.3 IC201.48
  Bottom 0.406: 36.79,39.24 36.79,40.09 v37.47,40.77
  Bottom 0.61: v37.47,40.77 36.96,41.27 SJ201.1
(copper drawn outside any net)
  shapes: Bottom circle x3

## Text on the board
Top: + power | LEDmodule | prog-port | PT. Respati Solusi Rekatama | LRT Display | ethernet | v-1.0
Bottom: -E- | respati